# Altium PCB pcb.PcbDoc
Units mm, origin at the board's own origin, x right, y up, seen from the top; angles counter-clockwise.
Board outline 100 x 100 mm, 2 copper layers (Top Layer, Bottom Layer); 2 components, 43 nets, 160 pads, 0 vias.
Unrouted connection lines stored in the file: 43.
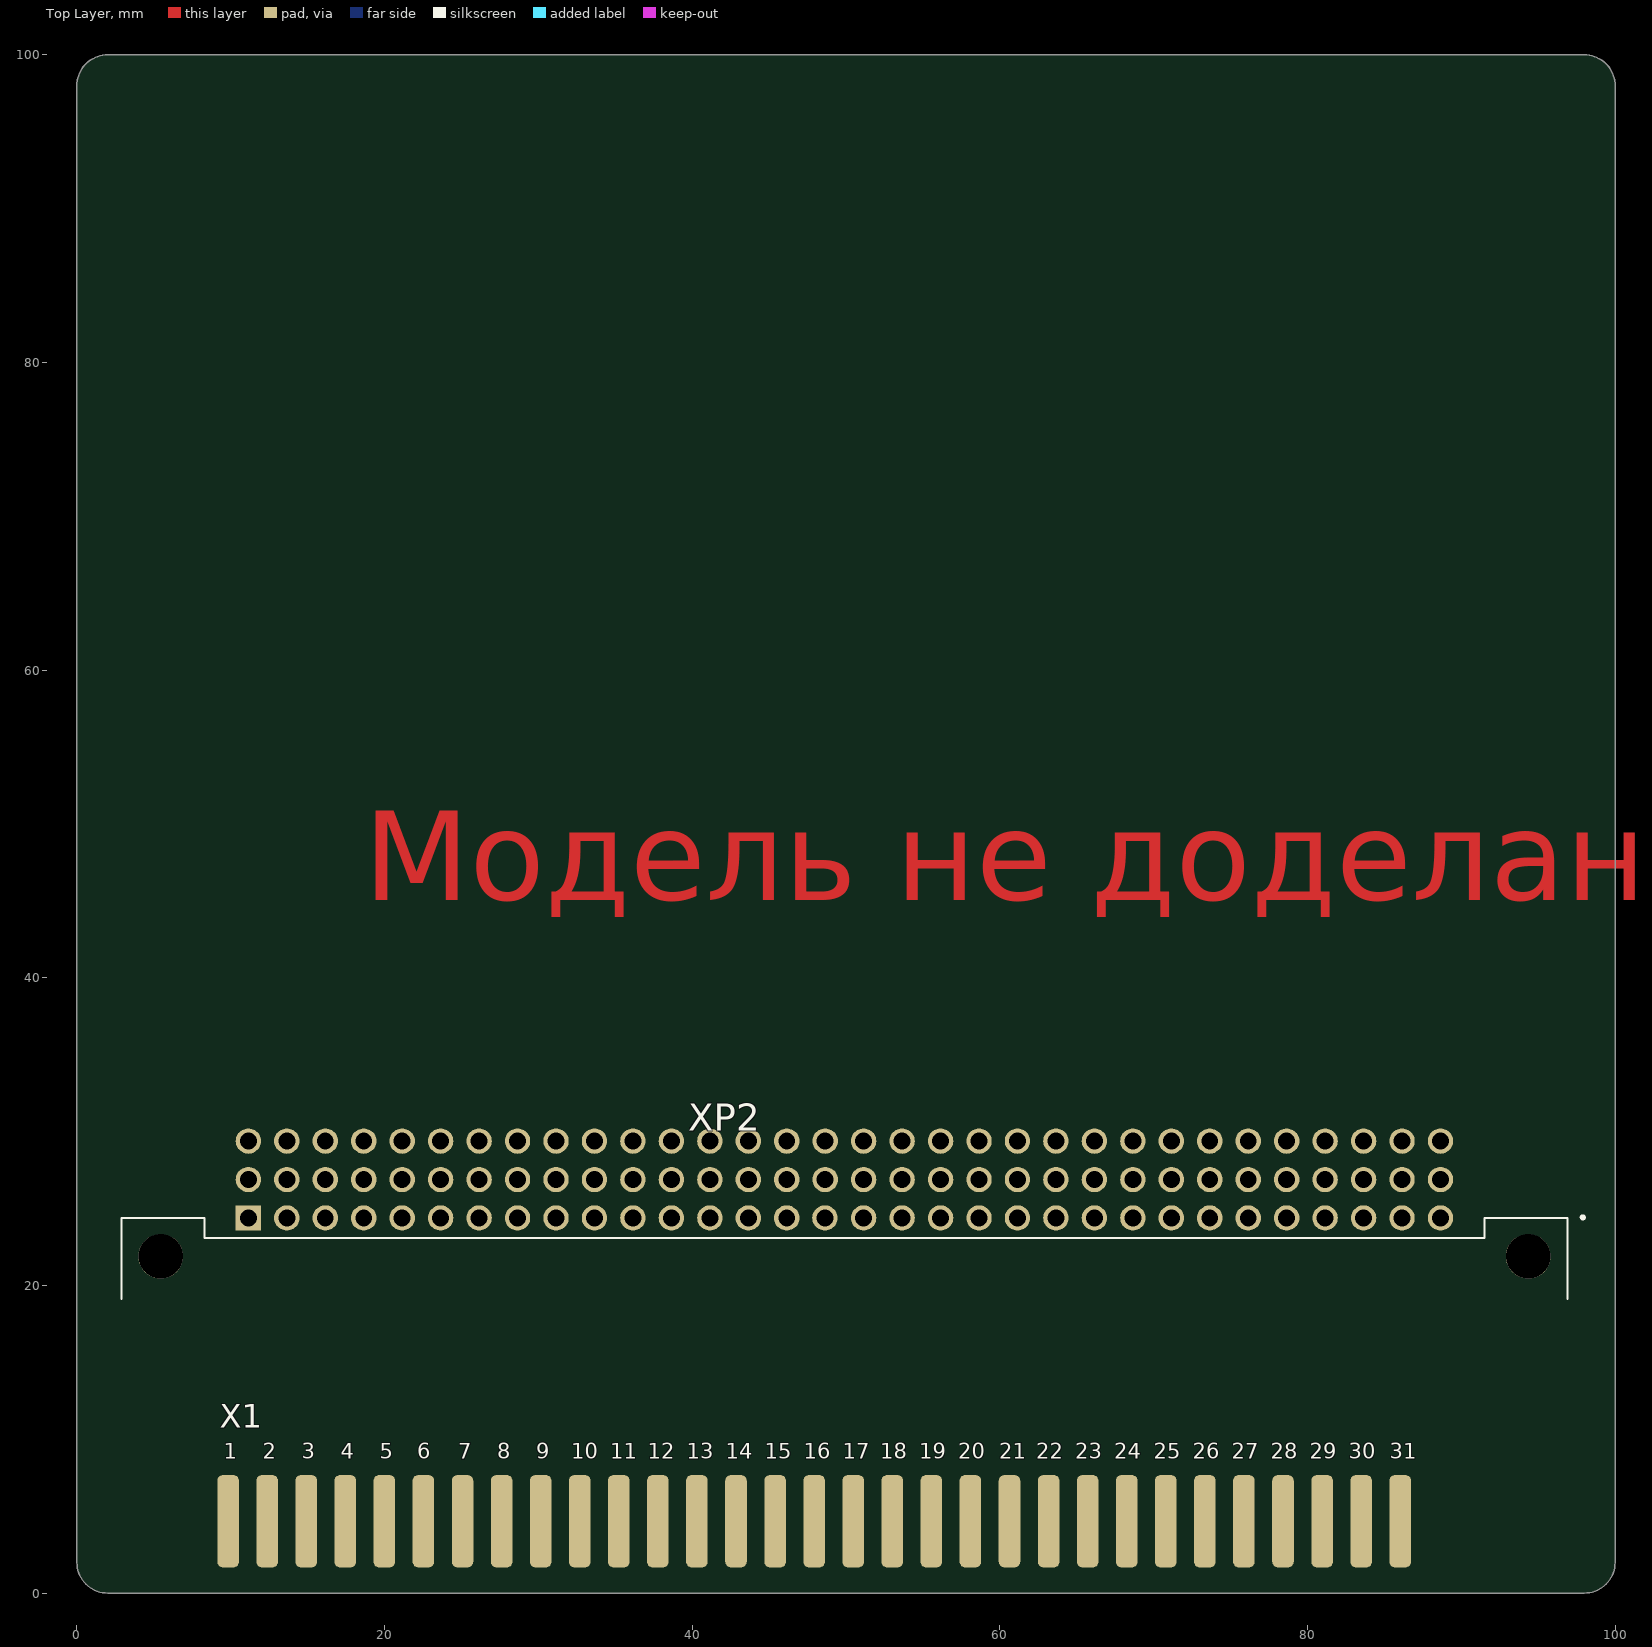
[diagram p0: Top Layer view]
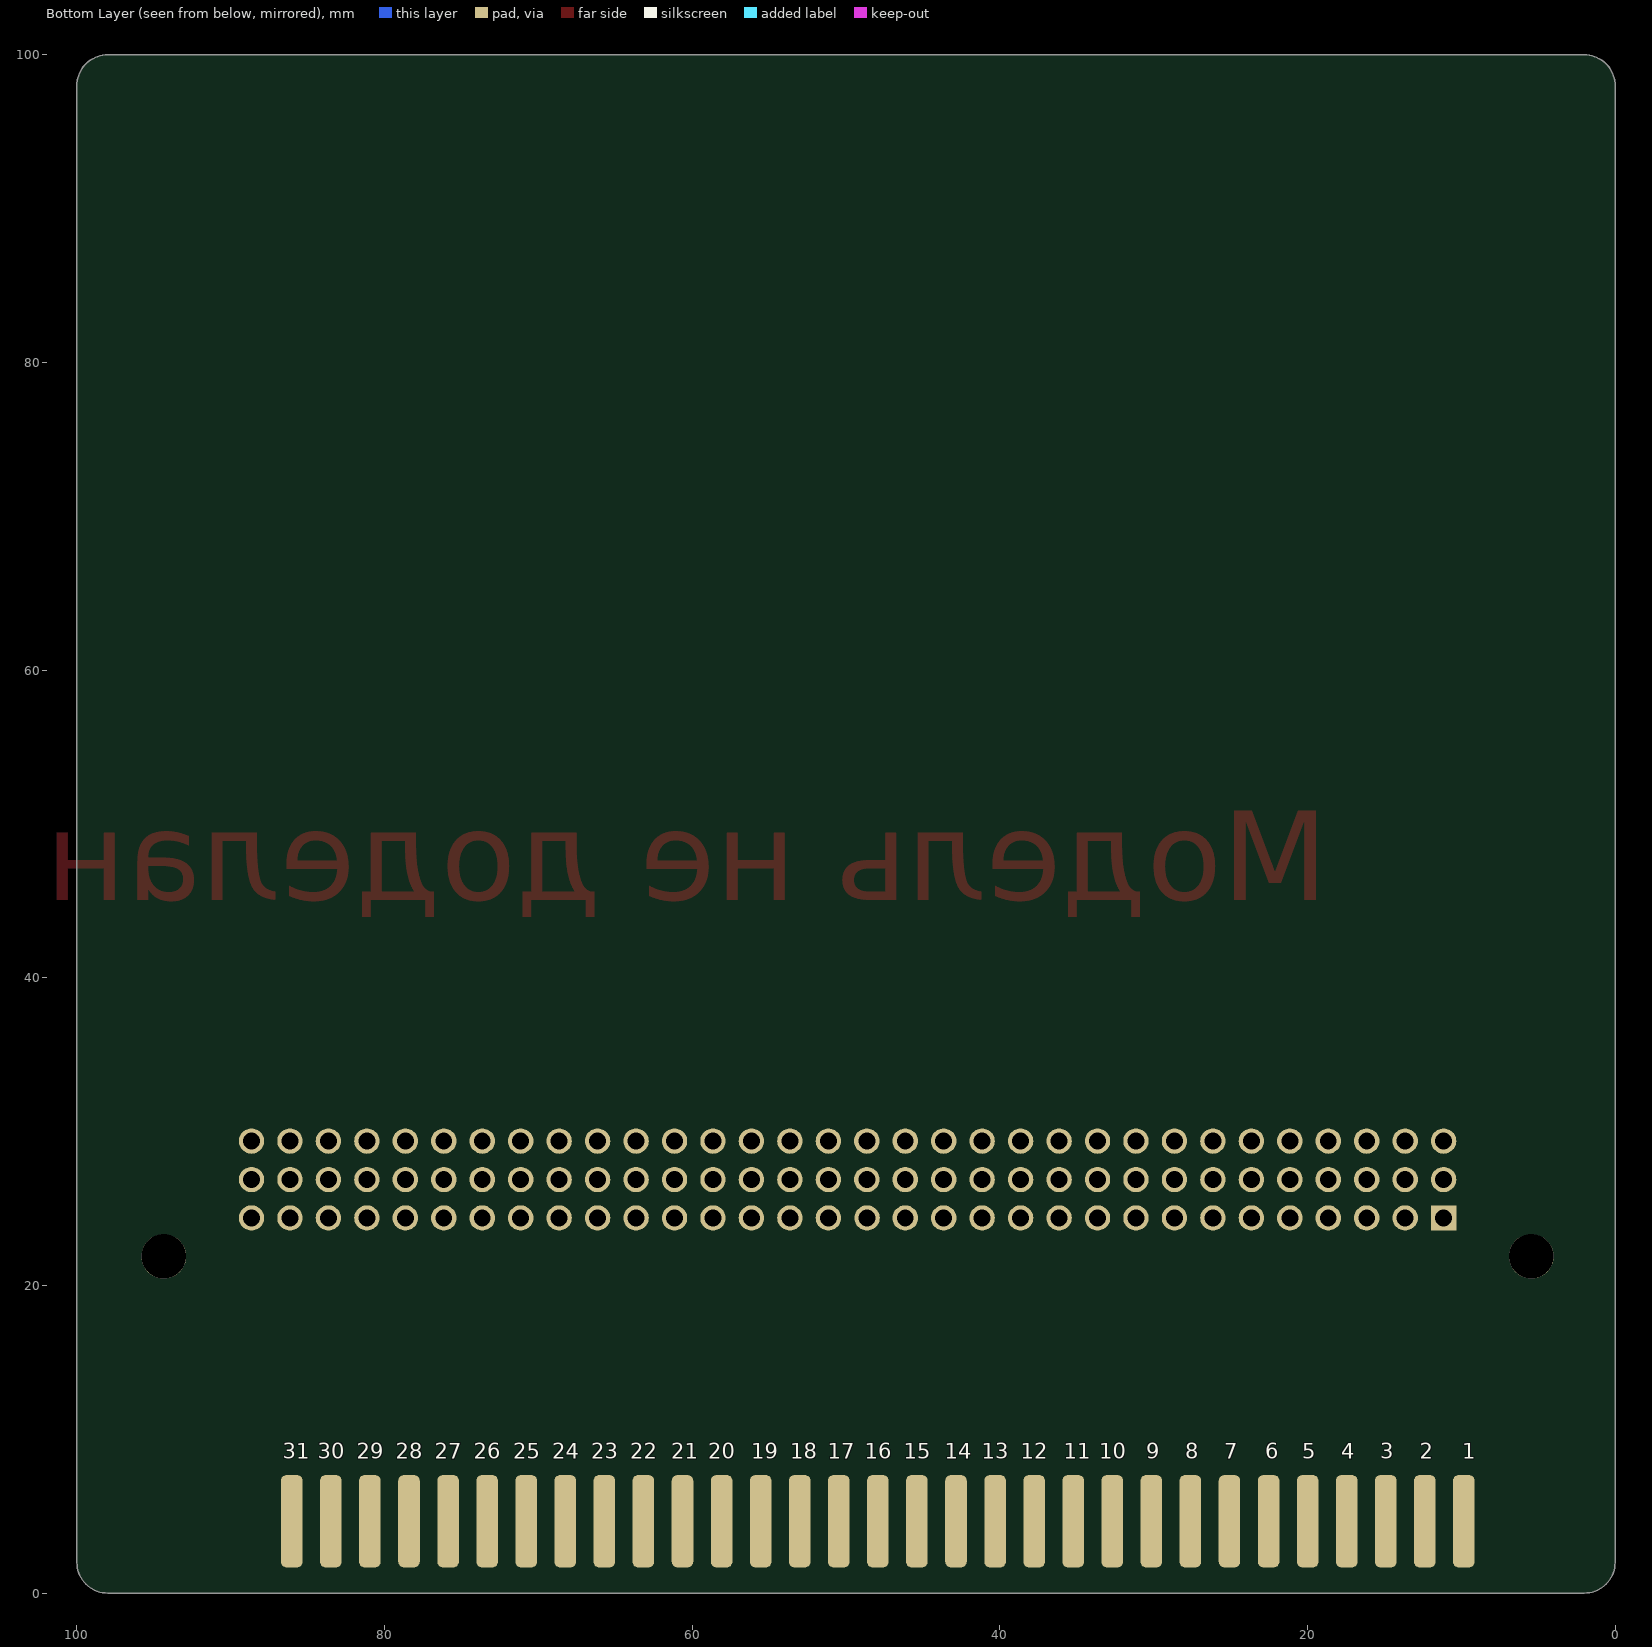
[diagram p1: Bottom Layer view, seen from below]

## Layer stack, top to bottom
Top Solder: solder mask 0.0102, Solder Resist, Dk 3.5
Top Layer: signal copper 0.0356
Dielectric 1: dielectric 0.32, FR-4, Dk 4.8
Bottom Layer: signal copper 0.0356
Bottom Solder: solder mask 0.0102, Solder Resist, Dk 3.5

## Board outline
2,0 cw(c2,2) 0,2 0,98 cw(c2,98) 2,100 98,100 cw(c98,98) 100,98 100,2 cw(c98,2) 98,0

## Design rules (kind name [scope] priority, off if disabled: settings)
Clearance [All] p1: gap=0.254 ignorepadtopadclearanceinfootprint=FALSE except(0: Arc-Hole Track-Hole SMDPad-Hole THPad-Hole Via-Hole Fill-Hole Poly-Hole Region-Hole Text-Hole)
PolygonConnect [All] p1: connectstyle=Relief reliefconductorwidth=0.254 reliefentries=4 polygonreliefangle="90 Angle" airgapwidth=0.254
RoomDefinition main [InComponentClass('main')] p1: confinementstyle=ConfineIn formatcopy=TRUE lockcomponents=FALSE outline -0.44,-8.31 104.775,-8.31 104.775,100.33 -0.44,100.33
RoutingVias [All] p1: holewidth=0.711 width=1.27 viastyle="Through Hole" minholewidth=0.711 minwidth=1.27 maxholewidth=0.711 maxwidth=1.27
SolderMaskExpansion [All] p1: expansion=0.102
Width [All] p1: maxlimit=0.54 minlimit=0.254 preferedwidth=0.254 minimp=50.000000 maximp=50.000000 favimp=50.000000
30 further rules are at their usual default settings.

## Components (designator, comment, footprint, x,y, rotation, side; value= is the part's Value field where it differs from the comment)
X1 "Bus" BUS 47.895,4.674 r0 top
XP2 "СНП59-64В-23" DELTA-HOST 49.898,24.388 r0 top

## Footprints (in the part's own frame and the unit in brackets; to place one, negate y for a bottom-side part, rotate by r counter-clockwise, add the part's x,y. Pads: shape width x height; smd on the part's side, far side on the other; paste and mask are expansions set on the pad)
BUS [mm]
  rrect50% 1.4x6 smd: 1(-38.065,0) 2(-35.525,0) 3(-32.985,0) 4(-30.445,0) 5(-27.905,0) 6(-25.365,0) 7(-22.825,0) 8(-20.285,0) 9(-17.745,0) 10(-15.205,0) 11(-12.665,0) 12(-10.125,0) 13(-7.585,0) 14(-5.045,0) 15(-2.505,0) 16(0.035,0) 17(2.575,0) 18(5.115,0) 19(7.655,0) 20(10.195,0) 21(12.735,0) 22(15.275,0) 23(17.815,0) 24(20.355,0) 25(22.895,0) 26(25.435,0) 27(27.975,0) 28(30.515,0) 29(33.055,0) 30(35.595,0) 31(38.135,0)
  rrect50% 1.4x6 smd far side: 32(-38.06,0) 33(-35.525,0) 34(-32.985,0) 35(-30.445,0) 36(-27.905,0) 37(-25.365,0) 38(-22.825,0) 39(-20.285,0) 40(-17.745,0) 41(-15.205,0) 42(-12.665,0) 43(-10.125,0) 44(-7.585,0) 45(-5.045,0) 46(-2.505,0) 47(0.035,0) 48(2.575,0) 49(5.115,0) 50(7.655,0) 51(10.195,0) 52(12.735,0) 53(15.275,0) 54(17.815,0) 55(20.355,0) 56(22.895,0) 57(25.435,0) 58(27.975,0) 59(30.515,0) 60(33.055,0) 61(35.595,0) 62(38.135,0)
DELTA-HOST [mm]
  rect 1.65x1.65 / inner round 1.65 / far side rect 1.65x1.65 hole 1.1: A1(-38.75,0)
  round 1.65 hole 1.1: A2(-36.25,0) A3(-33.75,0) A4(-31.25,0) A5(-28.75,0) A6(-26.25,0) A7(-23.75,0) A8(-21.25,0) A9(-18.75,0) A10(-16.25,0) A11(-13.75,0) A12(-11.25,0) A13(-8.75,0) A14(-6.25,0) A15(-3.75,0) A16(-1.27,0) A17(1.25,0) A18(3.75,0) A19(6.25,0) A20(8.75,0) A21(11.25,0) A22(13.75,0) A23(16.25,0) A24(18.75,0) A25(21.25,0) A26(23.75,0) A27(26.25,0) A28(28.75,0) A29(31.25,0) A30(33.75,0) A31(36.25,0) A32(38.75,0) B1(-38.75,2.5) B2(-36.25,2.5) B3(-33.75,2.5) B4(-31.25,2.5) B5(-28.75,2.5) B6(-26.25,2.5) B7(-23.75,2.5) B8(-21.25,2.5) B9(-18.75,2.5) B10(-16.25,2.5) B11(-13.75,2.5) B12(-11.25,2.5) B13(-8.75,2.5) B14(-6.25,2.5) B15(-3.75,2.5) B16(-1.25,2.5) B17(1.25,2.5) B18(3.75,2.5) B19(6.25,2.5) B20(8.75,2.5) B21(11.25,2.5) B22(13.75,2.5) B23(16.25,2.5) B24(18.75,2.5) B25(21.25,2.5) B26(23.75,2.5) B27(26.25,2.5) B28(28.75,2.5) B29(31.25,2.5) B30(33.75,2.5) B31(36.25,2.5) B32(38.75,2.5) C1(-38.75,5) C2(-36.25,5) C3(-33.75,5) C4(-31.25,5) C5(-28.75,5) C6(-26.25,5) C7(-23.75,5) C8(-21.25,5) C9(-18.75,5) C10(-16.25,5) C11(-13.75,5) C12(-11.25,5) C13(-8.75,5) C14(-6.25,5) C15(-3.75,5) C16(-1.25,5) C17(1.25,5) C18(3.75,5) C19(6.25,5) C20(8.75,5) C21(11.25,5) C22(13.75,5) C23(16.25,5) C24(18.75,5) C25(21.25,5) C26(23.75,5) C27(26.25,5) C28(28.75,5) C29(31.25,5) C30(33.75,5) C31(36.25,5) C32(38.75,5)
  round 2.9 hole 2.9 unplated: ""(-44.45,-2.5) ""(44.45,-2.5)
  silkscreen extent -47,-5.26 48.1,0.14, body extent -47,-0.42 47,17.7, height 11.4

## Nets (pads, with @x,y where several pads share a name; then routed paths per layer and width w, separated by ;. In a path a pad name is that pad's centre, name@x,y a point inside that pad or via, vN(x,y) a via of type N, cw(c..) or ccw(c..) an arc to the next point about the centre after c; other vN are vias at no path point)
A0: X1.40 XP2.A8
A1: X1.41 XP2.A9
A2: X1.42 XP2.A10
A3: X1.43 XP2.A11
A4: X1.55 XP2.A23
A5: X1.54 XP2.A22
A6: X1.53 XP2.A21
A7: X1.52 XP2.A20
A8: X1.26 XP2.C25
A9: X1.58 XP2.A26
A10: X1.27 XP2.C26
A11: X1.59 XP2.A27
A12: X1.33 XP2.A2
A13: X1.2 XP2.C2
A14: X1.32 XP2.A1
A15: X1.1 XP2.C1
BAK: X1.57
BRQ: X1.50 XP2.A18
D0: X1.6 XP2.C5
D1: X1.7 XP2.C6
D2: X1.8 XP2.C7
D3: X1.11 XP2.C10
D4: X1.12 XP2.C11
D5: X1.10 XP2.C9
D6: X1.9 XP2.C8
D7: X1.3 XP2.C3
DOS: X1.35
GND: X1.30 X1.37 X1.38 X1.45 X1.61 XP2.A5 XP2.A6 XP2.A13
HALT: X1.15 XP2.C14
INT: X1.13 XP2.C12
IOGE: X1.44
IORQ: X1.17 XP2.C16
M1: X1.24 XP2.C23
MREQ: X1.16 XP2.C15
NMI: X1.14 XP2.C13
RB: X1.4
RD: X1.18 XP2.C17
RDR: X1.46
RFSH: X1.25 XP2.C24
RST: X1.51
VCC: X1.34 XP2.A3
WAIT: X1.21 XP2.C20
WR: X1.19 XP2.C18
pads on no net: X1.5 X1.20 X1.22 X1.23 X1.28 X1.29 X1.31 X1.36 X1.39 X1.47 X1.48 X1.49 X1.56 X1.60 X1.62 XP2. XP2.A4 XP2.A7 XP2.A12 XP2.A14 XP2.A15 XP2.A16 XP2.A17 XP2.A19 XP2.A24 XP2.A25 XP2.A28 XP2.A29 XP2.A30 XP2.A31 XP2.A32 XP2.B1 XP2.B2 XP2.B3 XP2.B4 XP2.B5 XP2.B6 XP2.B7 XP2.B8 XP2.B9 XP2.B10 XP2.B11 XP2.B12 XP2.B13 XP2.B14 XP2.B15 XP2.B16 XP2.B17 XP2.B18 XP2.B19 XP2.B20 XP2.B21 XP2.B22 XP2.B23 XP2.B24 XP2.B25 XP2.B26 XP2.B27 XP2.B28 XP2.B29 XP2.B30 XP2.B31 XP2.B32 XP2.C4 XP2.C19 XP2.C21 XP2.C22 XP2.C27 XP2.C28 XP2.C29 XP2.C30 XP2.C31 XP2.C32

## Text inside footprints (layer, text, board x,y; h text height)
X1: Top Overlay "1" at 9.541,8.738 h1; Top Overlay "2" at 12.081,8.738 h1; Top Overlay "4" at 17.161,8.738 h1; Top Overlay "3" at 14.621,8.738 h1; Top Overlay "7" at 24.781,8.738 h1; Top Overlay "8" at 27.321,8.738 h1; Top Overlay "6" at 22.114,8.738 h1; Top Overlay "5" at 19.701,8.738 h1; Top Overlay "13" at 39.64,8.738 h1; Top Overlay "14" at 42.18,8.738 h1; Top Overlay "16" at 47.26,8.738 h1; Top Overlay "15" at 44.72,8.738 h1; Top Overlay "11" at 34.687,8.738 h1; Top Overlay "12" at 37.1,8.738 h1; Top Overlay "10" at 32.147,8.738 h1; Top Overlay "9" at 29.861,8.738 h1; Top Overlay "25" at 69.993,8.738 h1; Top Overlay "26" at 72.533,8.738 h1; Top Overlay "28" at 77.613,8.738 h1; Top Overlay "27" at 75.073,8.738 h1; Top Overlay "31" at 85.36,8.738 h1; Top Overlay "30" at 82.693,8.738 h1; Top Overlay "29" at 80.153,8.738 h1; Top Overlay "21" at 59.96,8.738 h1; Top Overlay "22" at 62.373,8.738 h1; Top Overlay "24" at 67.453,8.738 h1; Top Overlay "23" at 64.913,8.738 h1; Top Overlay "19" at 54.753,8.738 h1; Top Overlay "20" at 57.293,8.738 h1; Top Overlay "18" at 52.213,8.738 h1; Top Overlay "17" at 49.8,8.738 h1; Bottom Overlay "1" at 9.922,8.738 h1; Bottom Overlay "2" at 12.716,8.738 h1; Bottom Overlay "5" at 20.336,8.738 h1; Bottom Overlay "6" at 22.749,8.738 h1; Bottom Overlay "9" at 30.496,8.738 h1; Bottom Overlay "18" at 53.61,8.738 h1; Bottom Overlay "3" at 15.256,8.738 h1; Bottom Overlay "4" at 17.796,8.738 h1; Bottom Overlay "8" at 27.956,8.738 h1; Bottom Overlay "7" at 25.416,8.738 h1; Bottom Overlay "10" at 33.544,8.738 h1; Bottom Overlay "11" at 35.83,8.738 h1; Bottom Overlay "15" at 46.244,8.738 h1; Bottom Overlay "14" at 43.577,8.738 h1; Bottom Overlay "13" at 41.164,8.738 h1; Bottom Overlay "17" at 51.197,8.738 h1; Bottom Overlay "16" at 48.784,8.738 h1; Bottom Overlay "20" at 58.944,8.738 h1; Bottom Overlay "21" at 61.357,8.738 h1; Bottom Overlay "23" at 66.564,8.738 h1; Bottom Overlay "24" at 69.104,8.738 h1; Bottom Overlay "27" at 76.724,8.738 h1; Bottom Overlay "26" at 74.184,8.738 h1; Bottom Overlay "29" at 81.804,8.738 h1; Bottom Overlay "30" at 84.344,8.738 h1; Bottom Overlay "31" at 86.63,8.738 h1; Bottom Overlay "12" at 38.624,8.738 h1; Bottom Overlay "19" at 56.15,8.738 h1; Bottom Overlay "22" at 64.024,8.738 h1; Bottom Overlay "28" at 79.264,8.738 h1; Bottom Overlay "25" at 71.644,8.738 h1
XP2: Mechanical 13 "PCB Edge" at 97.398,19.388 h0.81; Top Layer "Модель не доделана!" at 18.648,43.138 h10